# Altium PCB OmniChargePD.PcbDoc (part 1 of 2)
Units mm, origin at the board's own origin, x right, y up, seen from the top; angles counter-clockwise.
Board outline 77.8 x 67.8 mm, 4 copper layers (Top Layer, Signal Layer 1, Signal Layer 2, Bottom Layer), stack 0.778 mm thick; 111 components, 84 nets, 383 pads, 288 vias.
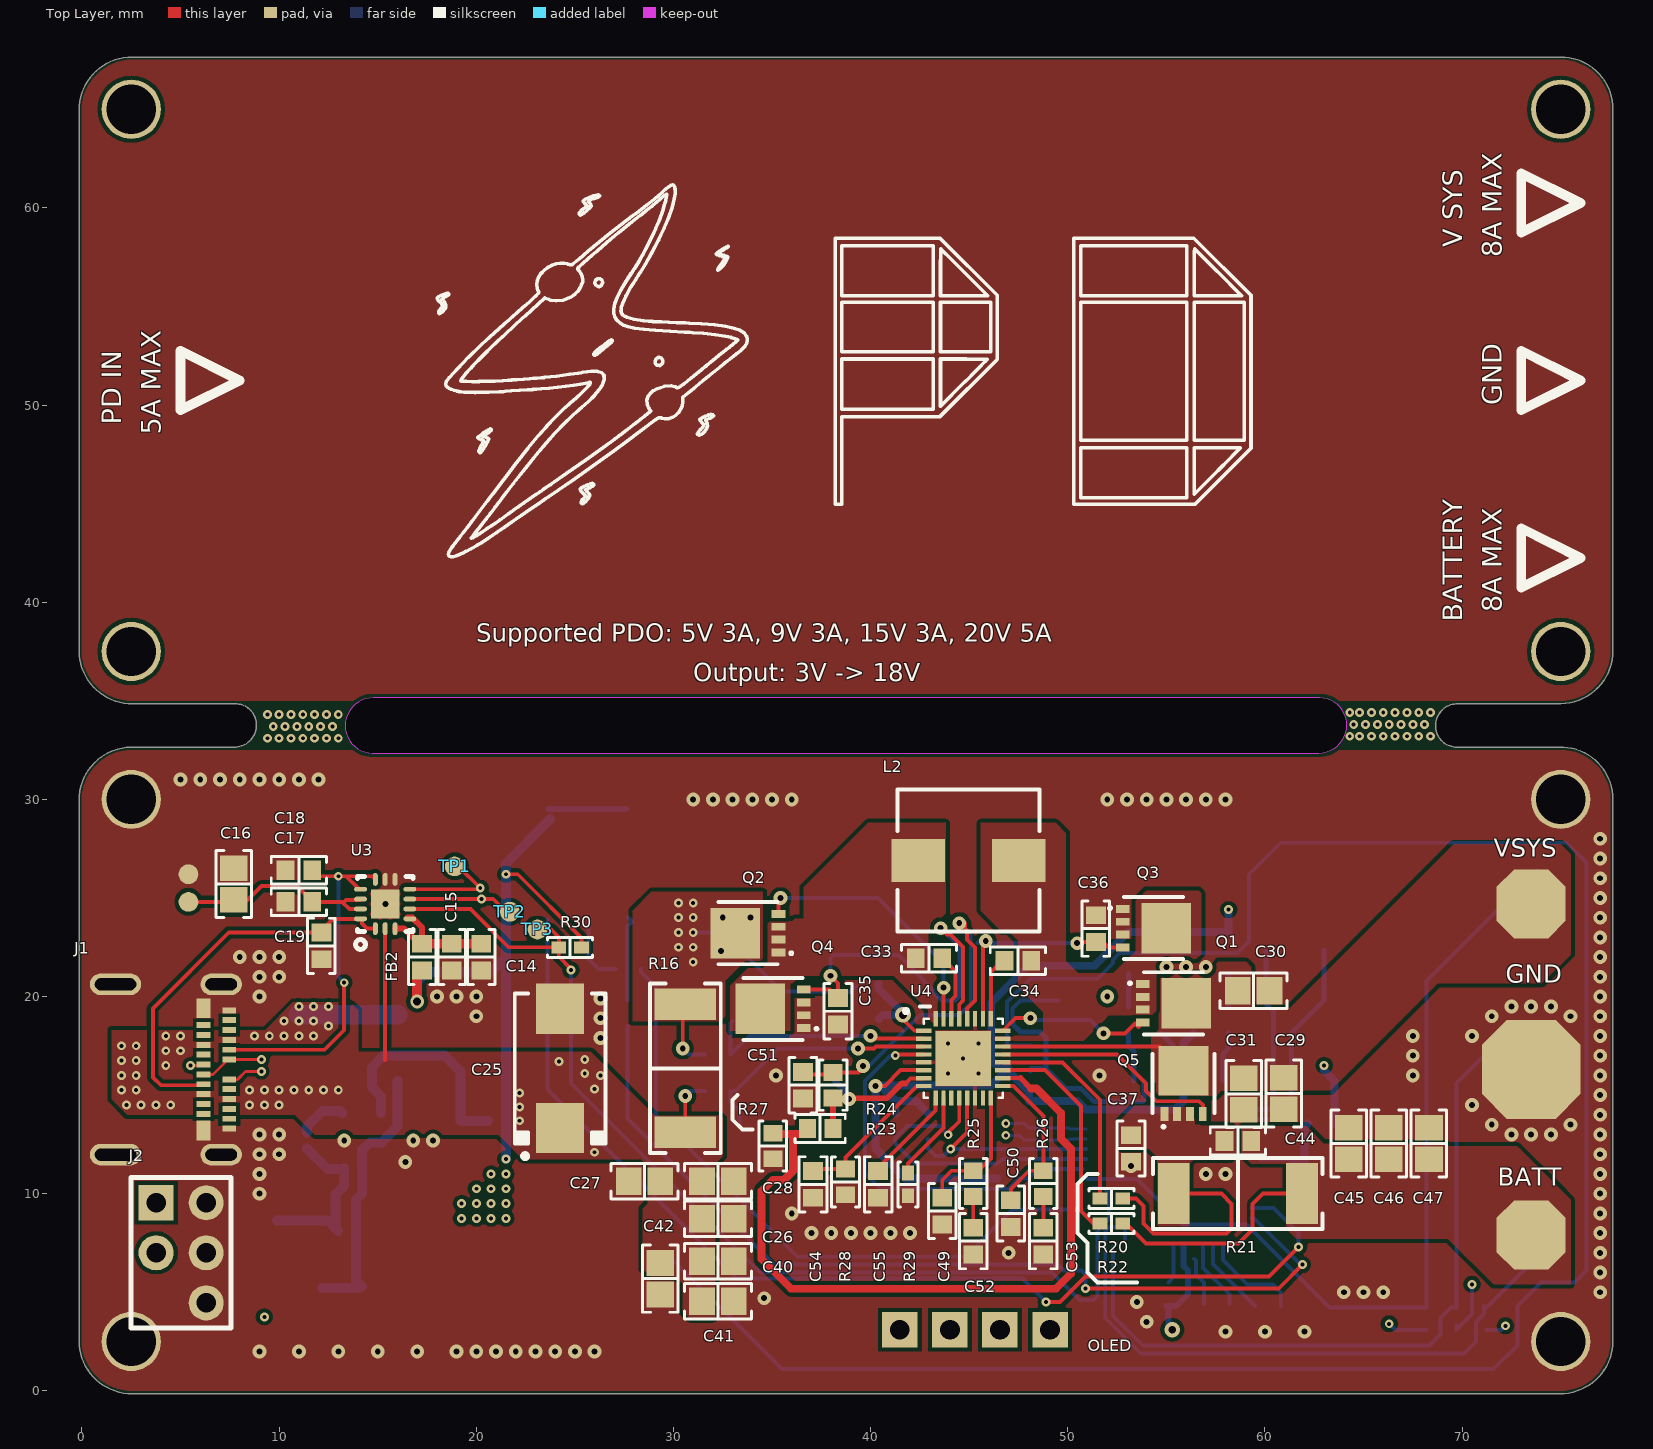
[diagram p0: Top Layer view]
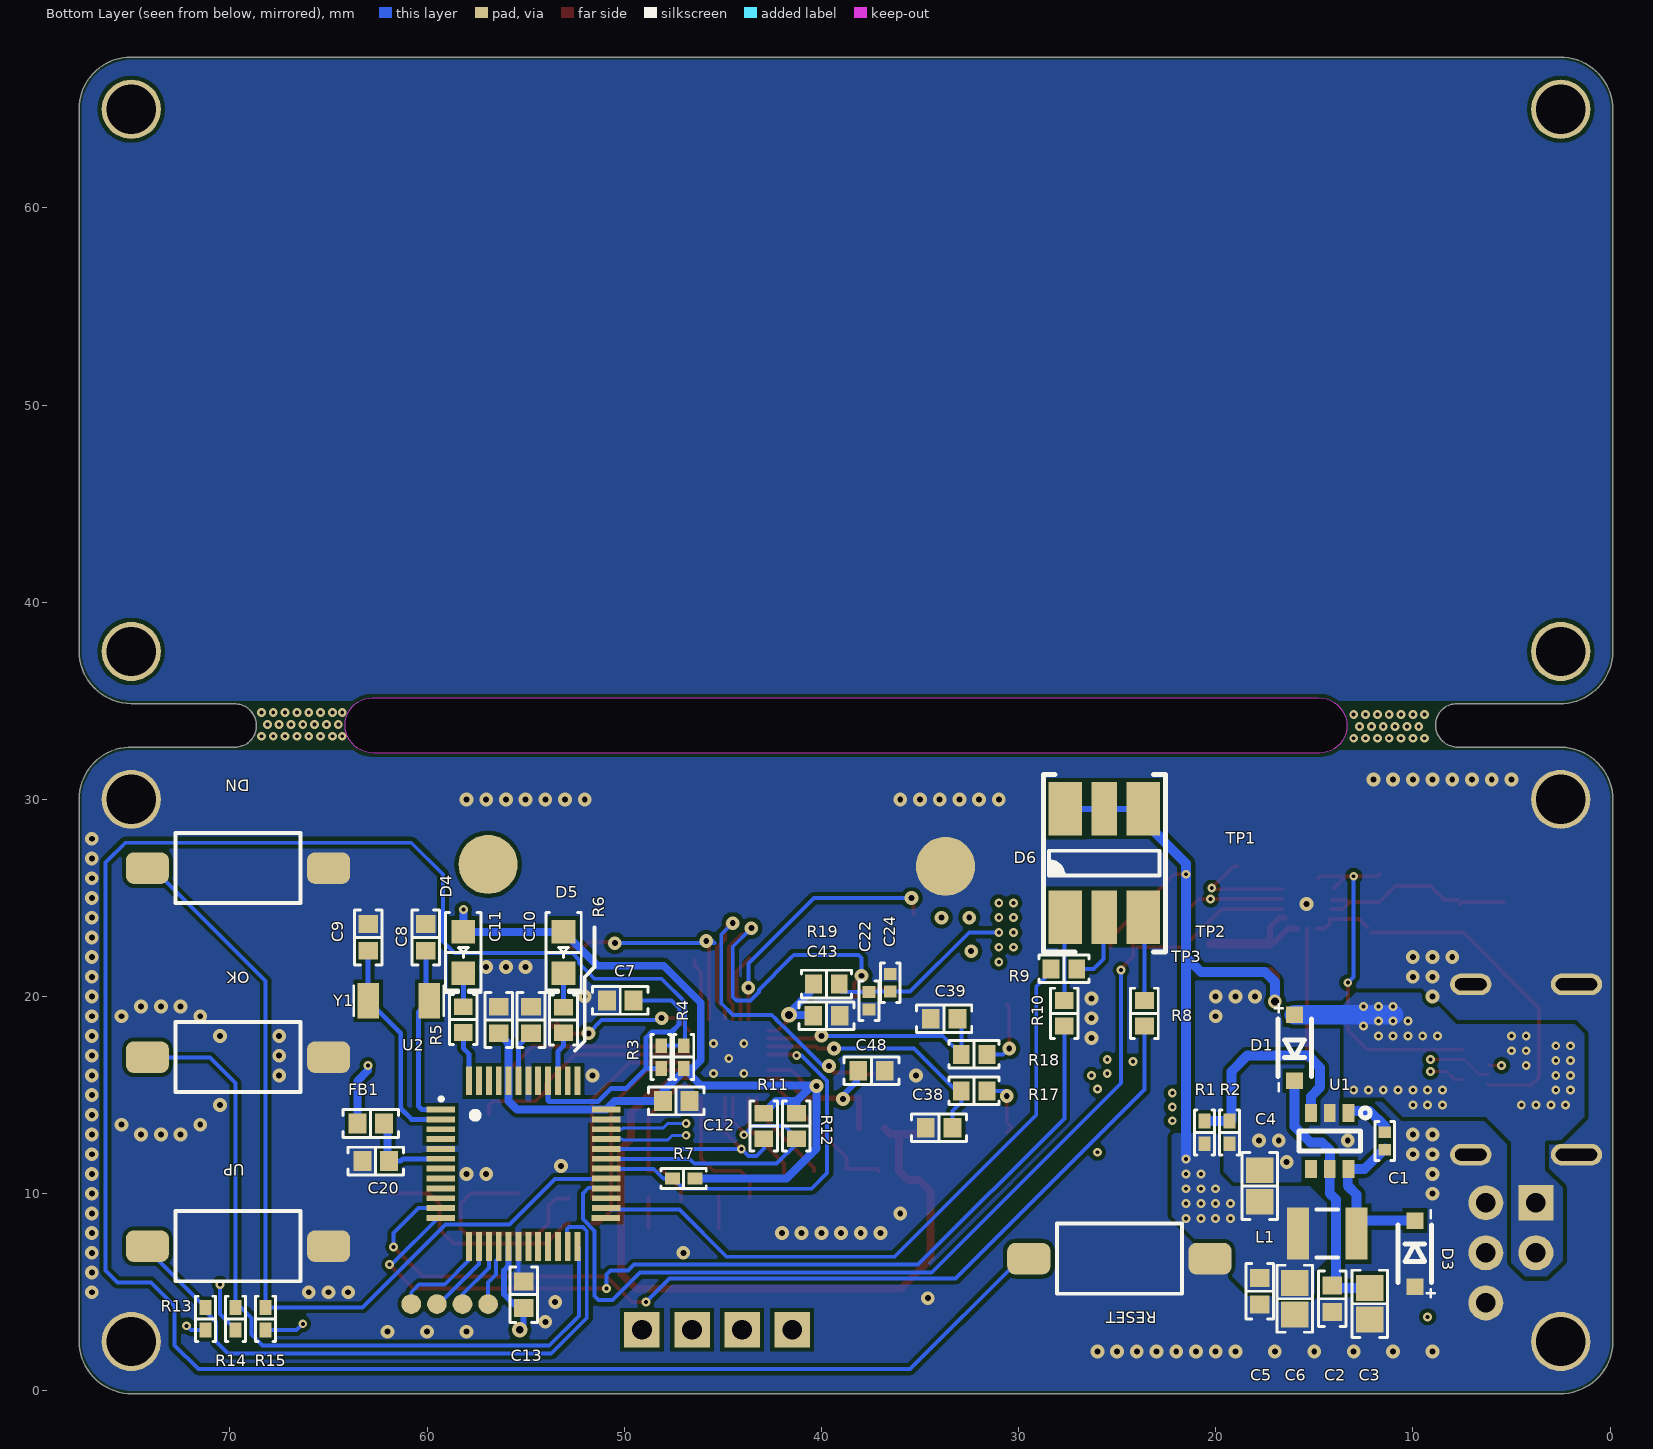
[diagram p1: Bottom Layer view, seen from below]
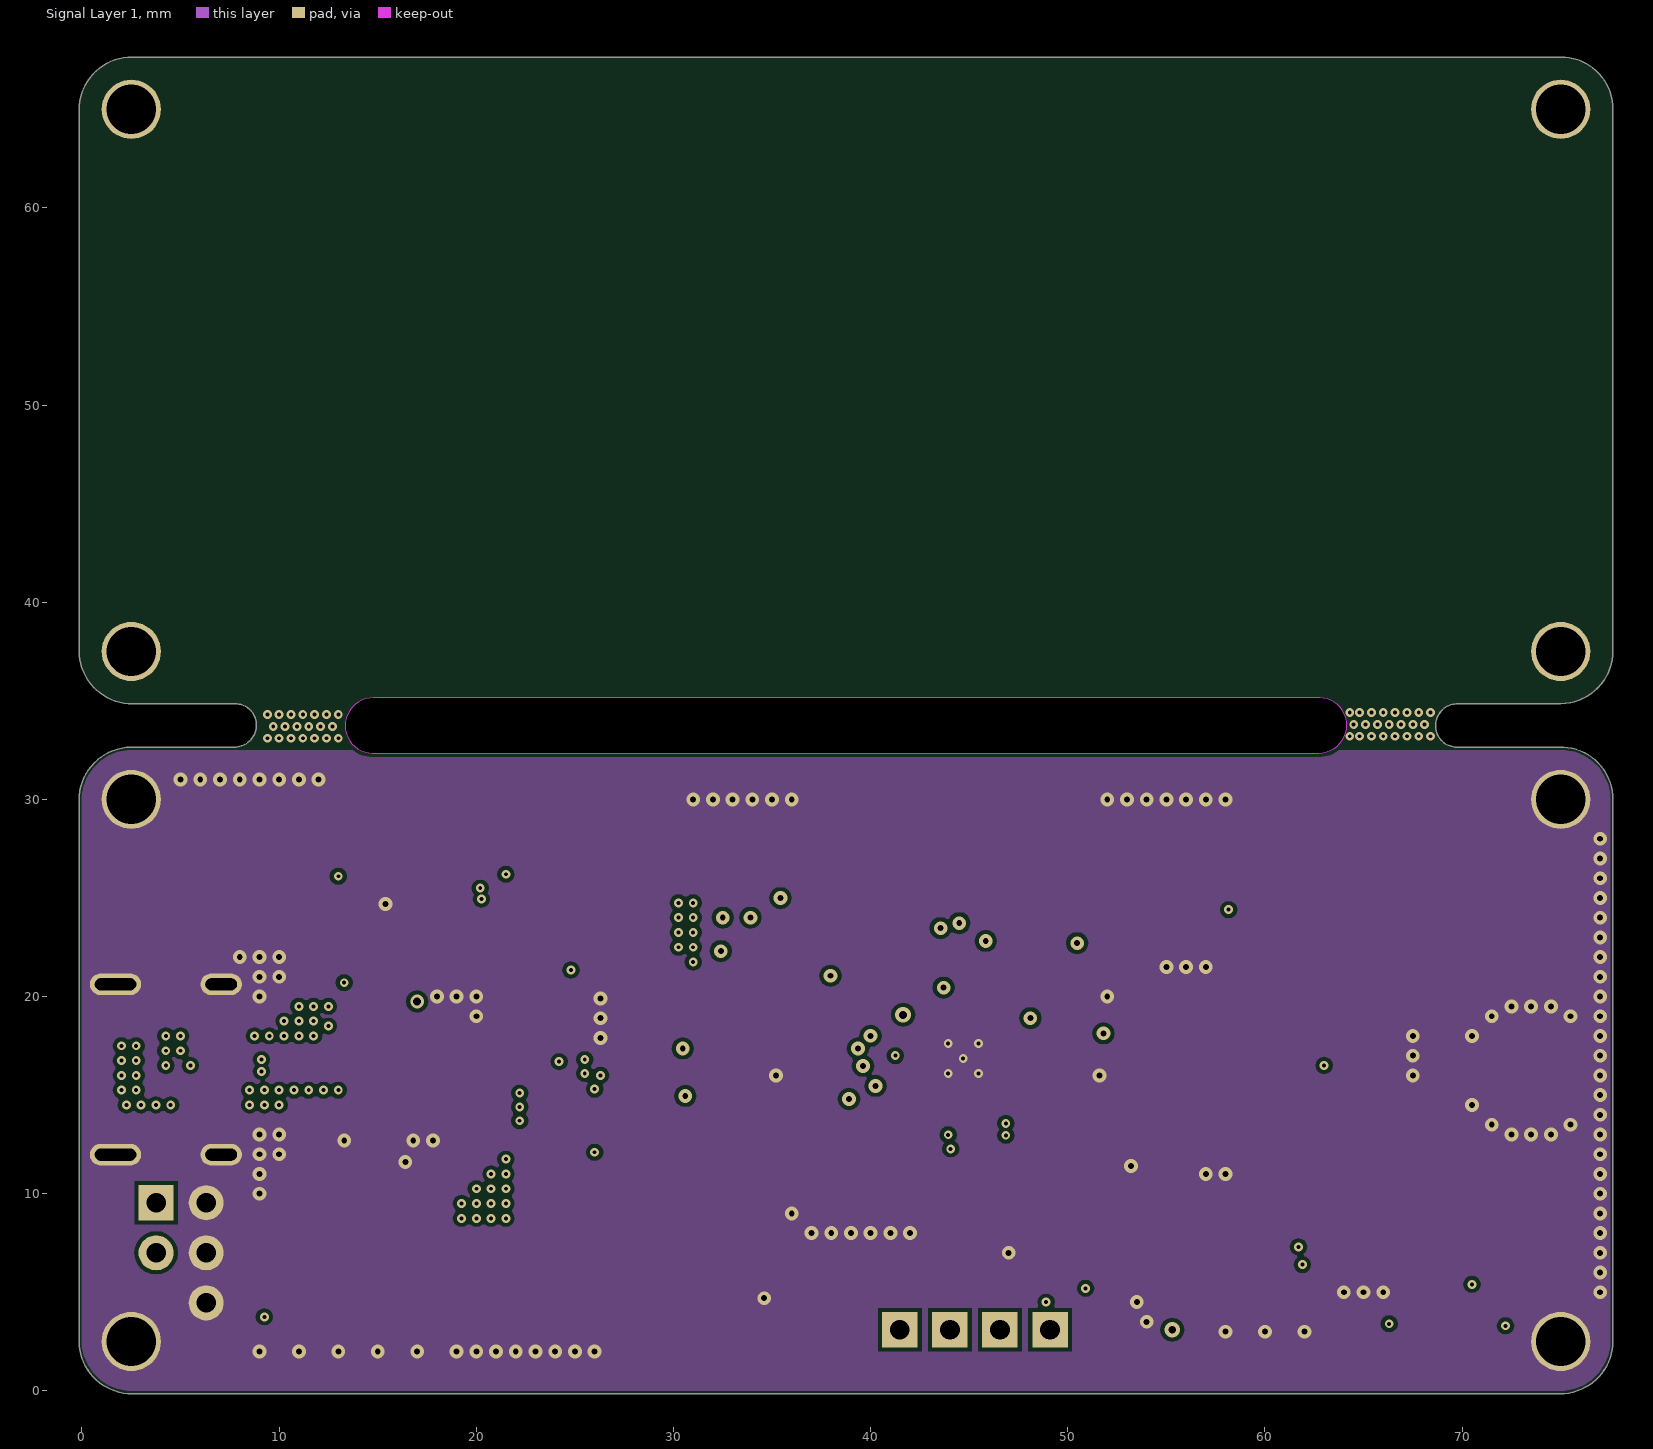
[diagram p2: Signal Layer 1]
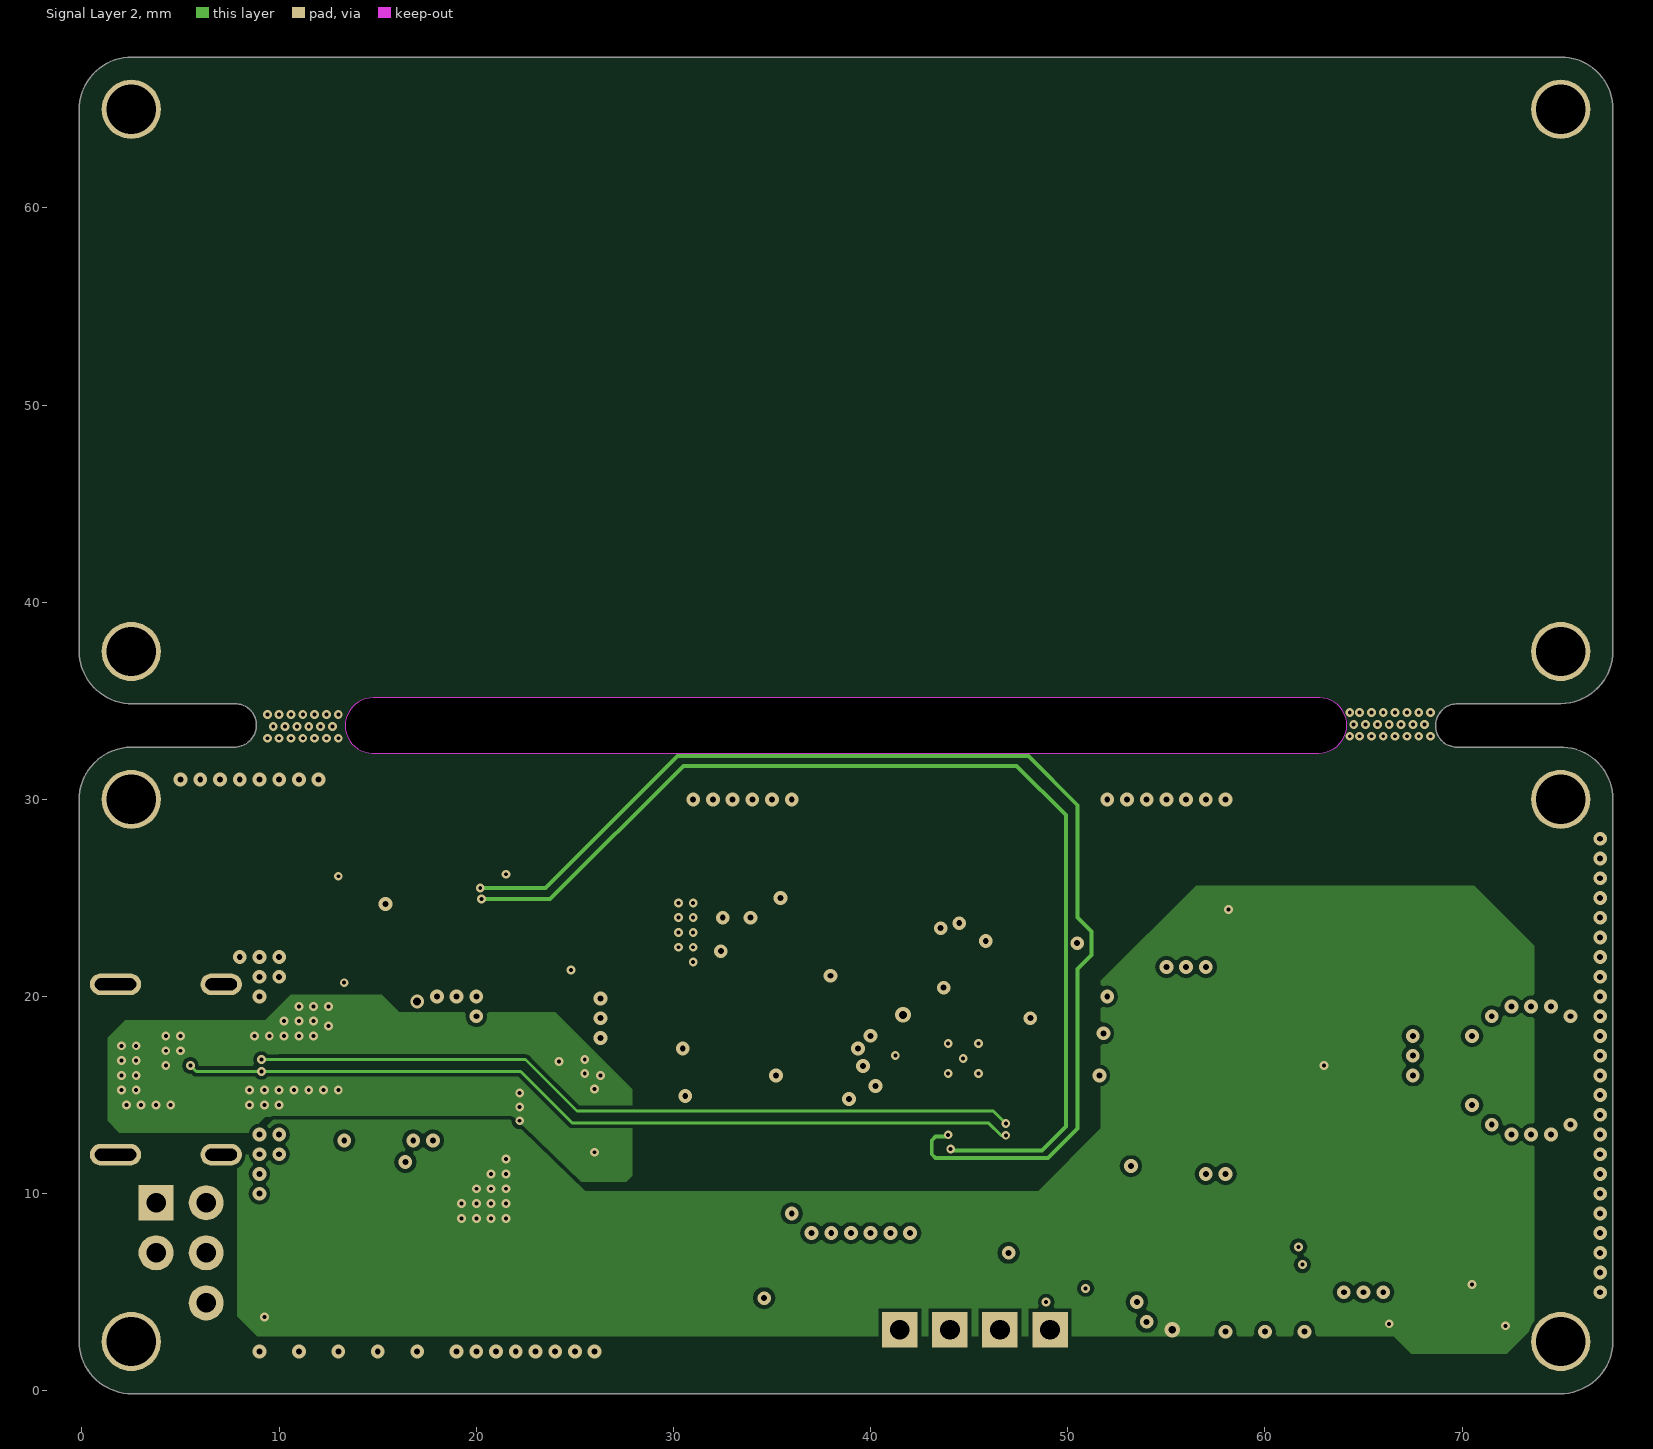
[diagram p3: Signal Layer 2]

## Layer stack, top to bottom
Top Solder: solder mask 0.0102, Solder Resist, Dk 3.5
Top Layer: signal copper 0.0356
Dielectric 1: core 0.254, FR-4, Dk 4.2
Signal Layer 1: signal copper 0.036
Dielectric 3: prepreg 0.127, Dk 4.2
Signal Layer 2: signal copper 0.036
Dielectric 2: core 0.254, Dk 4.2
Bottom Layer: signal copper 0.0356
Bottom Solder: solder mask 0.0102, Solder Resist, Dk 3.5

## Board outline
-0.15,2.54 -0.15,29.96 cw(c2.54,29.96) 2.488,32.65 cw(c2.5,32.5) 2.5,32.65 7.73,32.65 ccw(c7.73,33.77) 8.85,33.77 ccw(c7.77,33.77) 7.77,34.85 2.4,34.85 cw(c2.4,35) 2.357,34.856 cw(c2.54,37.54) -0.15,37.54 -0.15,64.96 cw(c2.54,64.96) 2.54,67.65 75,67.65 cw(c75,65) 77.65,65 77.65,37.54 cw(c74.96,37.54) 75.012,34.85 cw(c75,35) 75,34.85 69.77,34.85 ccw(c69.77,33.73) 68.65,33.73 ccw(c69.73,33.73) 69.73,32.65 75.1,32.65 cw(c75.1,32.5) 75.131,32.647 cw(c75,30) 77.65,30 77.65,2.54 cw(c74.96,2.54) 74.96,-0.15 2.54,-0.15 cw(c2.54,2.54)
cut-out: 14.73,32.35 62.73,32.35 ccw(c62.73,33.77) 64.15,33.77 ccw(c62.77,33.77) 62.77,35.15 14.77,35.15 ccw(c14.77,33.73) 13.35,33.73 ccw(c14.73,33.73)

## Design rules (kind name [scope] priority, off if disabled: settings)
Clearance [All] p1: gap=0.2 ignorepadtopadclearanceinfootprint=FALSE except(0.089: Arc-Arc Arc-Track Arc-SMDPad Arc-THPad Arc-Via Track-Track Track-SMDPad Track-THPad Track-Via SMDPad-SMDPad SMDPad-THPad SMDPad-Via THPad-THPad THPad-Via Via-Via; 0.127: Arc-Text Track-Text SMDPad-Text THPad-Text Via-Text Fill-Text Poly-Text Region-Text Text-Text)
DiffPairsRouting [All] p1: maxlimit=0.45 minlimit=0.45 mostfreqgap=0.45 toplayer_minwidth=0.15 toplayer_maxwidth=0.15 toplayer_prefwidth=0.15 midlayer1_minwidth=0.15 midlayer1_maxwidth=0.15 midlayer1_prefwidth=0.15 midlayer2_minwidth=0.15 midlayer2_maxwidth=0.15 midlayer2_prefwidth=0.15 bottomlayer_minwidth=0.15 bottomlayer_maxwidth=0.15 bottomlayer_prefwidth=0.15 maxuncoupledlength=12.7
HoleSize [All] p1: absolutevalues=TRUE maxlimit=3 minlimit=0.3 maxpercent=80.000 minpercent=20.000
MinimumSolderMaskSliver [All] p1: minsoldermaskwidth=0.1
PlaneClearance [All] p1: clearance=0.2
PlaneConnect PlaneConnect_2 [InNet('5V_2')] p1: planeconnectstyle=Direct reliefexpansion=0.508 reliefentries=4 reliefconductorwidth=0.254 reliefairgap=0.254
PlaneConnect PlaneConnect_1 [InNet('5V_1')] p2: planeconnectstyle=Direct reliefexpansion=0.508 reliefentries=4 reliefconductorwidth=0.254 reliefairgap=0.254
PlaneConnect [All] p3: pad.planeconnectstyle=Relief pad.reliefexpansion=0.508 pad.reliefentries=4 pad.reliefconductorwidth=0.254 pad.reliefairgap=0.254 via.planeconnectstyle=Direct via.reliefexpansion=0.508 via.reliefentries=4 via.reliefconductorwidth=0.254 via.reliefairgap=0.254
PolygonConnect PolygonConnect_11 [All] p1: connectstyle=Direct reliefconductorwidth=0.254 reliefentries=4 polygonreliefangle="90 Angle" airgapwidth=0.254
RoutingVias [All] p1: holewidth=0.3 width=0.7 viastyle="Through Hole" minholewidth=0.2 minwidth=0.45 maxholewidth=2 maxwidth=3
SilkToSilkClearance [All] p1: silktosilkclearance=0
SilkToSolderMaskClearance [IsPad] p1: minsilkscreentomaskgap=0 clearancetoexposedcopper=TRUE
SolderMaskExpansion [All] p1: expansion=0.102
Width [All] p1: maxlimit=3 minlimit=0.15 preferedwidth=0.25
23 further rules are at their usual default settings.

## Classes and differential pairs
component class USB-C: C1 C2 C3 C4 C5 C6 D1 D3 J2 L1 R1 R2 U1 X1 X2 X3 X4
component class MCU: C7 C8 C9 C10 C11 C12 C13 C14 C15 C16 C17 C18 C19 C20 D4 D5 D6 DN FB1 FB2 OK OLED R3 R4 R5 R6 R7 R8 R9 R10 R11 R12 R13 R14 R15 R30 RESET RX TP1 TP2 TP3 TX U2 U3 UP Y1
component class Charger: C22 C24 C25 C26 C27 C28 C29 C30 C31 C33 C34 C35 C36 C37 C38 C39 C40 C41 C42 C43 C44 C45 C46 C47 C48 C49 C50 C51 C52 C53 C54 C55 L2 Q1 Q2 Q3 Q4 Q5 R16 R17 R18 R19 R20 R21 R22 R23 R24 R25 R26 R27 R28 R29 U4
differential pair USB: +USB_P -USB_N

## Components (designator, comment, footprint, x,y, rotation, side; value= is the part's Value field where it differs from the comment)
C1 "10000pF" "CAP 0402/1005" 11.421,12.672 r270 bottom
C2 "1uF" "CAP 0603/1608" 14.088,4.671 r270 bottom
C3 "10uF" "CAP 0805/2012" 12.183,4.417 r90 bottom
C4 "10uF" "CAP 0805/2012" 17.771,10.386 r270 bottom
C5 "1uF" "CAP 0603/1608" 17.771,5.052 r270 bottom
C6 "10uF" "CAP 0805/2012" 15.993,4.671 r90 bottom
C7 "10000pF" "CAP 0603/1608" 50.2,19.8 r180 bottom
C8 "22pF" "CAP 0603/1608" 60.062,22.999 r90 bottom
C9 "22pF" "CAP 0603/1608" 62.983,22.999 r90 bottom
C10 "1uF" "CAP 0603/1608" 54.728,18.808 r270 bottom
C11 "0.1uF" "CAP 0603/1608" 56.363,18.808 r270 bottom
C12 "0.1uF" "CAP 0603/1608" 47.362,14.704 r0 bottom
C13 "0.1uF" "CAP 0603/1608" 55.1,4.875 r270 bottom
C14 "1uF" "CAP 0603/1608" 20.25,22 r90 top
C15 "0.1uF" "CAP 0603/1608" 18.75,22 r90 top
C16 "10uF" "CAP 0805/2012" 7.7,25.7 r270 top
C17 "0.1uF" "CAP 0603/1608" 11,24.8 r0 top
C18 "470pF" "CAP 0603/1608" 11,26.4 r0 top
C19 "470pF" "CAP 0603/1608" 12.143,22.57 r90 top
C20 "0.1uF" "CAP 0603/1608" 62.602,11.656 r180 bottom
C22 "1000pF" "CAP 0402/1005" 37.583,19.784 r270 bottom
C24 "10000pF" "CAP 0402/1005" 36.5,20.7 r90 bottom
C25 "47uF" "CAP POL 2917/7343" 24.248,16.355 r90 top
C26 "10uF" "CAP 0805/2012" 32.249,8.735 r180 top
C27 "10uF" "CAP 0805/2012" 28.528,10.64 r0 top
C28 "10uF" "CAP 0805/2012" 32.249,10.64 r180 top
C29 "10uF" "CAP 0805/2012" 60.951,15.085 r90 top
C30 "10uF" "CAP 0805/2012" 59.427,20.292 r180 top
C31 "10uF" "CAP 0805/2012" 58.919,15.063 r90 top
C33 "0.047uF" "CAP 0603/1608" 42.957,21.943 r180 top
C34 "0.047uF" "CAP 0603/1608" 47.466,21.82 r0 top
C35 "150pF" "CAP 0603/1608" 38.345,19.252 r90 top
C36 "150pF" "CAP 0603/1608" 51.426,23.442 r270 top
C37 "1uF" "CAP 0603/1608" 53.204,12.291 r90 top
C38 "0.033uF" "CAP 0603/1608" 34.027,13.345 r180 bottom
C39 "0.033uF" "CAP 0603/1608" 33.773,18.868 r180 bottom
C40 "10uF" "CAP 0805/2012" 32.249,6.576 r180 top
C41 "10uF" "CAP 0805/2012" 32.249,4.544 r180 top
C42 "10uF" "CAP 0805/2012" 29.328,5.687 r90 top
C43 "0.47uF" "CAP 0603/1608" 39.742,19.022 r180 bottom
C44 "0.1uF" "CAP 0603/1608" 58.625,12.672 r180 top
C45 "10uF" "CAP 0805/2012" 64.253,12.545 r90 top
C46 "10uF" "CAP 0805/2012" 66.285,12.545 r270 top
C47 "10uF" "CAP 0805/2012" 68.317,12.545 r270 top
C48 "1uF" "CAP 0603/1608" 37.456,16.228 r180 bottom
C49 "33pF" "CAP 0603/1608" 43.632,9.116 r90 top
C50 "15pF" "CAP 0603/1608" 47.108,8.989 r90 top
C51 "3.3uF" "CAP 0603/1608" 36.567,15.502 r90 top
C52 "1800pF" "CAP 0603/1608" 45.203,7.592 r90 top
C53 "680pF" "CAP 0603/1608" 48.759,7.592 r90 top
C54 "100pF" "CAP 0603/1608" 37.075,10.473 r90 top
C55 "100pF" "CAP 0603/1608" 40.377,10.473 r90 top
D1 "MF-DIO-SOD123-BAT42" SOD-123 16,17.4 r90 bottom value=BAT42
D3 "MF-DIO-SOD123-BAT42" SOD-123 9.897,6.957 r270 bottom value=BAT42
D4 "Orange" "LED 0805/2012 YELLOW" 58.157,22.231 r270 bottom value=Green
D5 "Orange" "LED 0805/2012 YELLOW" 53.077,22.231 r270 bottom value=Green
D6 "SLV6A-FKB-CK1P1G1BB7R3R3" "LED PLCC6-CREE 5.5x5.3MM" 25.645,26.769 r90 bottom
DN "FSMSMTR" "TE FSMSMTR" 69.587,26.515 r270 bottom locked (schematic designator S4)
FB1 "30 Ohm @ 100MHz" "FER 0603/1608" 62.856,13.561 r180 bottom
FB2 "30 Ohm @ 100MHz" "FER 0603/1608" 17.25,22 r90 top
J1 "1054500101" 1054500101 3.7,16.3 r270 top
J2 "MF-CON-2.54mm-2x3" CONN_HEADER_02x03_2mm54_Straight 5.03,7 r270 top value="HDR 02x03 2mm54 Straight"
L1 "MF-IND-1210-10uH" L1210 14.342,7.973 r0 bottom value=10uH
L2 "2.2uH" "WURTH WE-HCI 7040" 44.959,26.896 r0 top
OK "FSMSMTR" "TE FSMSMTR" 69.587,16.926 r270 bottom locked (schematic designator S3)
OLED "Comment" "Header 1x4 male" 46.56,3.1 r0 top
Q1 "CSD17551Q3A" SON65P300X350X90-9N 55.353,19.657 r0 top
Q2 "CSD17551Q3A" SON65P300X350X90-9N 33.773,23.213 r180 top
Q3 "CSD17551Q3A" SON65P300X350X90-9N 54.337,23.467 r0 top
Q4 "CSD17551Q3A" SON65P300X350X90-9N 35.053,19.375 r180 top
Q5 "CSD25402Q3A" SON65P300X350X90-9N 55.871,15.593 r90 top
R1 "680k" "RES 0402/1005" 20.565,13.112 r270 bottom
R2 "220k" "RES 0402/1005" 19.295,13.112 r90 bottom
R3 "330" "RES 0402/1005" 48.124,16.93 r90 bottom
R4 "10k" "RES 0402/1005" 46.981,16.93 r90 bottom
R5 "470" "RES 0603/1608" 58.157,18.829 r270 bottom
R6 "470" "RES 0603/1608" 53.077,18.81 r270 bottom
R7 "10k" "RES 0402/1005" 46.981,10.77 r0 bottom
R8 "470" "RES 0603/1608" 23.613,19.149 r270 bottom
R9 "470" "RES 0603/1608" 27.7,21.4 r0 bottom
R10 "470" "RES 0603/1608" 27.677,19.149 r270 bottom
R11 "1.5k" "RES 0603/1608" 42.917,13.432 r90 bottom
R12 "1.5k" "RES 0603/1608" 41.266,13.434 r90 bottom
R13 "10k" "RES 0402/1005" 71.238,3.655 r90 bottom
R14 "10k" "RES 0402/1005" 69.714,3.655 r90 bottom
R15 "10k" "RES 0402/1005" 68.19,3.655 r90 bottom
R16 "CSR25120R01F" "STACKPOLE CSR2512" 30.598,16.355 r90 top value=0.01
R17 "4.99" "RES 0603/1608" 32.249,15.212 r180 bottom
R18 "4.99" "RES 0603/1608" 32.249,17.063 r180 bottom
R19 "1" "RES 0603/1608" 39.742,20.632 r0 bottom
R20 "10" "RES 0402/1005" 52.212,9.751 r0 top
R21 "CSR25120R01F" "STACKPOLE CSR2512" 58.627,10.005 r180 top value=0.01
R22 "10" "RES 0402/1005" 52.212,8.481 r0 top
R23 "120k" "RES 0603/1608" 37.441,13.307 r0 top
R24 "10" "RES 0603/1608" 38.091,15.502 r270 top
R25 "40.2k" "RES 0603/1608" 45.203,10.513 r90 top
R26 "10k" "RES 0603/1608" 48.759,10.513 r90 top
R27 "100k" "RES 0603/1608" 35.043,12.418 r90 top
R28 "137k" "RES 0603/1608" 38.726,10.6 r90 top
R29 "30.1k" "RES 0402/1005" 41.901,10.473 r90 top
R30 "10k" "RES 0402/1005" 24.756,22.492 r0 top
RESET "FSMSMTR" "TE FSMSMTR" 24.883,6.703 r270 bottom (schematic designator S1)
TP1 "TESTPOINT" TP_1mm 18.9,26.6 r90 top
TP2 "TESTPOINT" TP_1mm 21.7,24.3 r90 top
TP3 "TESTPOINT" TP_1mm 23.1,23.4 r90 top
U1 "RT8258GJ6" SOT23-6 14.215,12.672 r270 bottom
U2 "ATSAMD21G18A-AUT" QFP50P900X900X120-48N 55.113,11.52 r180 bottom
U3 "FUSB302BMPX" MLP14 15.378,24.692 r90 top
U4 "BQ25703ARSNT" QFN40P400X400X80-33N 44.695,16.863 r0 top
UP "FSMSMTR" "TE FSMSMTR" 69.587,7.338 r270 bottom locked (schematic designator S2)
Y1 "32.768Khz" RESONATOR_EPSON_FC_145 61.433,19.784 r0 bottom

## Footprints (in the part's own frame and the unit in brackets; to place one, negate y for a bottom-side part, rotate by r counter-clockwise, add the part's x,y. Pads: shape width x height; smd on the part's side, far side on the other; paste and mask are expansions set on the pad)
1054500101 [mm]
  rect 0.3x0.7 smd: A1(-3,3.77) A2(-2.5,3.77) A3(-2,3.77) A4(-1.5,3.77) A5(-1,3.77) A6(-0.5,3.77) A7(0.5,3.77) A8(1,3.77) A9(1.5,3.77) A10(2,3.77) A11(2.5,3.77) A12(3,3.77) B2(2.25,2.47) B3(1.75,2.47) B4(1.25,2.47) B5(0.75,2.47) B6(0.25,2.47) B7(-0.25,2.47) B8(-0.75,2.47) B9(-1.25,2.47) B10(-1.75,2.47) B11(-2.25,2.47)
  rect 1x0.7 smd: B1(3.1,2.47) B12(-3.1,2.47)
  oval 1.1x2.1 hole 0.6 slot 1.6 at 90 deg: S1(-4.32,3.36) S2(4.32,3.36)
  oval 1.1x2.6 hole 0.6 slot 2.1 at 90 deg: S3(-4.32,-2) S4(4.32,-2)
  body extent -4.47,-3.94 4.47,3.96, height 3.16
"CAP 0402/1005" [mm] "Chip Capacitor, 2-Leads, Body 1.02x0.51mm, IPC Medium Density"
  rect 0.6x0.64 smd: 1(-0.44,0) 2(0.44,0)
  silkscreen extent -1,-0.5 1,0.5, body extent -0.5,-0.26 0.5,0.26, height 0.52
"CAP 0603/1608" [mm] "Chip Capacitor, 2-Leads, Body 1.60x0.80mm, IPC Medium Density"
  rect 0.9x1 smd: 1(-0.675,0) 2(0.675,0)
  silkscreen extent -1.4,-0.7 1.4,0.7, body extent -0.8,-0.41 0.8,0.41, height 0.82
"CAP 0805/2012" [mm] "Chip Capacitor, 2-Leads, Body 2.00x1.20mm, IPC Medium Density"
  rect 1.3x1.4 smd: 1(-0.8,0) 2(0.8,0)
  silkscreen extent -1.7,-0.9 1.7,0.9, body extent -1,-0.64 1,0.64, height 1.26
"CAP POL 2917/7343" [mm] "Molded Capacitor, 2-Leads, Body 7.30x4.30mm, IPC Medium Density"
  rect 2.55x2.45 smd: 1(-3.025,0) 2(3.025,0)
  silkscreen extent -4.57,-2.3 3.8,2.3, body extent -3.65,-2.15 3.65,2.15, height 4.1
CONN_HEADER_02x03_2mm54_Straight [mil]
  rect 70x70 hole 39: 1(-100,-50)
  round 70 hole 39: 2(-100,50) 3(0,-50) 4(0,50) 6(100,50)
  round 0 smd: 5(100,-50)
  silkscreen extent -150,-100 150,100, body extent -150,-100 150,100, height 364
"FER 0603/1608" [mm] "Chip Ferrite, 2-Leads, Body 1.60x0.80mm, IPC Medium Density"
  rect 0.9x1 smd: 1(-0.675,0) 2(0.675,0)
  silkscreen extent -1.4,-0.7 1.4,0.7, body extent -0.8,-0.41 0.8,0.41, height 0.82
"Header 1x4 male" [mm] "2.54mm"
  rect 1.8x1.8 hole 1: 1(-5.08,0) 2(-2.54,0) 3(0,0) 4(2.54,0)
  body extent -6.35,-1.27 3.81,1.27, height 8.6
L1210 [mm]
  rect 1.1x2.64 smd: 1(-1.48,0) 2(1.48,0)
  silkscreen extent -0.55,-1.22 0.55,1.22, body extent -1.6,-1.25 1.6,1.25, height 2.5
"LED 0805/2012 YELLOW" [mm] "Chip Diode, 2-Leads, Body 2.00x1.25mm, IPC Medium Density"
  rect 1.2x1.2 smd: 1(-1.05,0) 2(1.05,0)
  silkscreen extent -2.03,-0.9 2.03,0.9, body extent -1,-0.63 1,0.63, height 0.9
"LED PLCC6-CREE 5.5x5.3MM" [mm] "SOJ, 6-Leads, Body 5.60x5.50mm, Pitch 1.80mm, IPC Medium Density"
  rect 2.7x1.7 smd: 1(-2.75,1.975) 3(-2.75,-1.975) 4(2.75,-1.975) 6(2.75,1.975)
  rect 2.7x1.3 smd: 2(-2.75,0) 5(2.75,0)
  silkscreen extent -4.5,-3.1 4.5,3.1, body extent -2.75,-2.75 2.75,2.75, height 2.6
MLP14 [mm]
  oval 0.65x0.25 smd: 1(-1.25,0.5) 2(-1.25,0) 3(-1.25,-0.5) 8(1.25,-0.5) 9(1.25,0) 10(1.25,0.5)
  oval 0.25x0.65 smd: 4(-0.75,-1.25) 5(-0.25,-1.25) 6(0.25,-1.25) 7(0.75,-1.25) 11(0.75,1.25) 12(0.25,1.25) 13(-0.25,1.25) 14(-0.75,1.25)
  rect 1.45x1.45 smd: 15(0,0)
  silkscreen extent -2.3,-1.4 1.4,1.5, body extent -1.25,-1.25 1.25,1.25, height 0.8
QFN40P400X400X80-33N [mm]
  rect 0.77x0.22 smd: 1(-2.005,1.4) 2(-2.005,1) 3(-2.005,0.6) 4(-2.005,0.2) 5(-2.005,-0.2) 6(-2.005,-0.6) 7(-2.005,-1) 8(-2.005,-1.4) 17(2.005,-1.4) 18(2.005,-1) 19(2.005,-0.6) 20(2.005,-0.2) 21(2.005,0.2) 22(2.005,0.6) 23(2.005,1) 24(2.005,1.4)
  rect 0.22x0.77 smd: 9(-1.4,-2.005) 10(-1,-2.005) 11(-0.6,-2.005) 12(-0.2,-2.005) 13(0.2,-2.005) 14(0.6,-2.005) 15(1,-2.005) 16(1.4,-2.005) 25(1.4,2.005) 26(1,2.005) 27(0.6,2.005) 28(0.2,2.005) 29(-0.2,2.005) 30(-0.6,2.005) 31(-1,2.005) 32(-1.4,2.005)
  rect 2.8x2.8 smd: 33(0,0)
  silkscreen extent -3,-2 2,2.5, body extent -2,-2 2,2, height 1.1
QFP50P900X900X120-48N [mm]
  rect 1.45x0.3 smd: 1(-4.2,2.75) 2(-4.2,2.25) 3(-4.2,1.75) 4(-4.2,1.25) 5(-4.2,0.75) 6(-4.2,0.25) 7(-4.2,-0.25) 8(-4.2,-0.75) 9(-4.2,-1.25) 10(-4.2,-1.75) 11(-4.2,-2.25) 12(-4.2,-2.75) 25(4.17,-2.75) 26(4.2,-2.25) 27(4.2,-1.75) 28(4.2,-1.25) 29(4.2,-0.75) 30(4.2,-0.25) 31(4.2,0.25) 32(4.2,0.75) 33(4.2,1.25) 34(4.2,1.75) 35(4.2,2.25) 36(4.2,2.75)
  rect 0.3x1.45 smd: 13(-2.75,-4.2) 14(-2.25,-4.2) 15(-1.75,-4.2) 16(-1.25,-4.2) 17(-0.75,-4.2) 18(-0.25,-4.2) 19(0.25,-4.2) 20(0.75,-4.2) 21(1.25,-4.2) 22(1.75,-4.2) 23(2.25,-4.2) 24(2.75,-4.2) 37(2.75,4.2) 38(2.25,4.2) 39(1.75,4.2) 40(1.25,4.2) 41(0.75,4.2) 42(0.25,4.2) 43(-0.25,4.2) 44(-0.75,4.2) 45(-1.25,4.2) 46(-1.75,4.2) 47(-2.25,4.2) 48(-2.75,4.2)
  silkscreen extent -4.27,2.33 -2.32,3.38
"RES 0402/1005" [mm] "Chip Resistor, 2-Leads, Body 1.0x0.5mm, IPC Medium Density"
  rect 0.75x0.6 smd: 1(-0.575,0) 2(0.575,0)
  silkscreen extent -1.14,-0.51 1.14,0.51, body extent -0.5,-0.25 0.5,0.25, height 0.35
"RES 0603/1608" [mm] "Chip Resistor, 2-Leads, Body 1.60x0.80mm, IPC Medium Density"
  rect 0.85x0.95 smd: 1(-0.65,0) 2(0.65,0)
  silkscreen extent -1.27,-0.7 1.27,0.7, body extent -0.8,-0.4 0.8,0.4, height 0.45
RESONATOR_EPSON_FC_145 [mm]
  rect 1.1x1.8 smd: P$1(-1.55,0) P$2(1.55,0)
  silkscreen extent -2.29,-0.76 2.29,0.76
SOD-123 [mm]
  rect 0.85x0.85 smd: 1(-1.675,0) 2(1.675,0)
  silkscreen extent -2.2,-0.85 2.2,1, body extent -1.43,-0.85 1.42,0.85, height 1.35
SON65P300X350X90-9N [mm]
  rect 0.7x0.4 smd: 1(-1.55,0.975) 2(-1.55,0.325) 3(-1.55,-0.325) 4(-1.55,-0.975)
  rect 2.51x2.55 smd: 5(0.645,0)
  silkscreen extent -2.28,-1.58 1.5,1.58, body extent -1.55,-1.68 1.81,1.68, height 1
SOT23-6 [mm]
  rect 0.9x0.6 smd: 1(-1.425,0.95) 2(-1.425,0) 3(-1.425,-0.95) 4(1.425,-0.95) 5(1.425,0) 6(1.425,0.95)
  silkscreen extent -1.67,-1.55 0.5,2.05, body extent -1.5,-1.55 1.5,1.55, height 1.3
"STACKPOLE CSR2512" [mm] "Chip Resistor, 2-Leads, Body 6.40x3.20mm, IPC Medium Density"
  rect 1.6x3.1 smd: 1(-3.25,0) 2(3.25,0)
  silkscreen extent -4.3,-1.8 4.3,1.8, body extent -3.27,-1.6 3.28,1.6, height 0.5
"TE FSMSMTR" [mm]
  rrect50% 1.6x2.19 smd: 1(0,4.595) 2(0,-4.595)
  silkscreen extent -1.78,-3.18 1.78,3.18, body extent -1.75,-4.98 1.75,4.98, height 4.42
TP_1mm [mm]
  round 1 smd paste-100: 1(0,0)
"WURTH WE-HCI 7040" [mm]
  rect 2.7x2.2 smd: 1(-2.55,0) 2(2.55,0)
  silkscreen extent -3.6,-3.6 3.6,3.6, body extent -3.49,-3.45 3.49,3.45, height 4

## Part data
C1 C24: library part GCM155R71H103KA55D, "CAP CER 10000PF 50V X7R 0402", Device Package="0402 (1005 Metric)", Manufacturer="Murata Electronics North America", Supplier Part Number 1=490-4762-2-ND, TemperatureCoefficient=X7R, TemperatureRange="-55C ~ 125C", Tolerance=10%, Voltage=50V, ComponentLink1Description=Datasheet, ComponentLink1URL=http://www.murata.com/~/media/webrenewal/support/library/catalog/products/capacitor/mlcc/c03e.ashx, ComponentLink2Description="Digi-Key Listing", ComponentLink2URL=https://www.digikey.com/product-detail/en/murata-electronics-north-america/GCM155R71H103KA55D/490-4762-2-ND/1641636, PartId=12381, Part Number=GCM155R71H103KA55D, Price=0,0067, Supplier 1=Digi-Key
C2 C5 C37 C48: library part GRM188R7YA105KA12D, "CAP CER 1UF 35V X7R 0603", Device Package="0603 (1608 Metric)", Manufacturer="Murata Electronics North America", Supplier Part Number 1=490-10487-2-ND, TemperatureCoefficient=X7R, TemperatureRange="-55C ~ 125C", Tolerance=10%, Voltage=35V, ComponentLink1Description=Datasheet, ComponentLink1URL=http://www.murata.com/~/media/webrenewal/support/library/catalog/products/capacitor/mlcc/c02e.ashx, ComponentLink2Description="Digi-Key listing", ComponentLink2URL=http://digikey.com/product-detail/en/GRM188R7YA105KA12D/490-10487-2-ND/5027572, PartId=5658, Part Number=GRM188R7YA105KA12D, Price=0,0735, Supplier 1=Digi-Key, Type="Derating Recommended"
C3 C4 C6 C16 C26 C27 C28 C29 C30 C31 C40 C41 C42 C45 C46 C47: library part C2012X5R1V106M085AC, "CAP CER 10UF 35V X5R 0805", Device Package="0805 (2012 Metric)", Manufacturer="TDK Corporation", Supplier Part Number 1=445-14419-2-ND, TemperatureCoefficient=X5R, TemperatureRange="-55C ~ 85C", Tolerance=20%, Voltage=35V, ComponentLink1Description=Datasheet, ComponentLink1URL=https://product.tdk.com/info/en/catalog/datasheets/mlcc_commercial_general_en.pdf, ComponentLink2Description="Digi-Key listing", ComponentLink2URL=http://digikey.com/product-detail/en/C2012X5R1V106M085AC/445-14419-2-ND/3951655, PartId=4768, Part Number=C2012X5R1V106M085AC, Price=0,2152, Supplier 1=Digi-Key, Type=-
C7: library part C0603C103M5RACTU, "CAP CER 10000PF 50V X7R 0603", Device Package="0603 (1608 Metric)", Manufacturer=Kemet, Supplier Part Number 1=399-7842-2-ND, TemperatureCoefficient=X7R, TemperatureRange="-55C ~ 125C", Tolerance=20%, Voltage=50V, ComponentLink1Description=Datasheet, ComponentLink1URL=http://www.kemet.com/docfinder?Partnumber=C0603C103M5RACTU, ComponentLink2Description="Digi-Key Listing", ComponentLink2URL=https://www.digikey.com/product-detail/en/kemet/C0603C103M5RACTU/399-7842-2-ND/2199766, PartId=13383, Part Number=C0603C103M5RACTU, Price=0,0046, Supplier 1=Digi-Key
C8 C9: library part C1608C0G1H220J080AA, "CAP CER 22PF 50V C0G 0603", Device Package="0603 (1608 Metric)", Manufacturer="TDK Corporation", Supplier Part Number 1=445-1273-1-ND, TemperatureCoefficient="C0G, NP0", TemperatureRange="-55C ~ 125C", Tolerance=5%, Voltage=50V, ComponentLink1Description=Datasheet, ComponentLink1URL=https://product.tdk.com/info/en/catalog/datasheets/mlcc_commercial_general_en.pdf, ComponentLink2Description="Digi-Key listing", ComponentLink2URL=http://digikey.com/product-detail/en/C1608C0G1H220J080AA/445-1273-1-ND/567670, PartId=4031, Part Number=C1608C0G1H220J080AA, Price=0,14, Supplier 1=Digi-Key, Type=-
C10 C14: library part C1608X7R1A105K080AC, "CAP CER 1UF 10V X7R 0603", Device Package="0603 (1608 Metric)", Manufacturer="TDK Corporation", Supplier Part Number 1=445-5138-1-ND, TemperatureCoefficient=X7R, TemperatureRange="-55C ~ 125C", Tolerance=10%, Voltage=10V, ComponentLink1Description=Datasheet, ComponentLink1URL=https://product.tdk.com/info/en/catalog/datasheets/mlcc_commercial_general_en.pdf, ComponentLink2Description="Digi-Key listing", ComponentLink2URL=http://digikey.com/product-detail/en/C1608X7R1A105K080AC/445-5138-1-ND/2093753, PartId=4035, Part Number=C1608X7R1A105K080AC, Price=0,14, Supplier 1=Digi-Key, Type=-
C11 C12 C13 C15 C17 C20 C44: library part C1608X7R1E104K080AA, "CAP CER 0.1UF 25V X7R 0603", Device Package="0603 (1608 Metric)", Manufacturer="TDK Corporation", Supplier Part Number 1=445-1316-1-ND, TemperatureCoefficient=X7R, TemperatureRange="-55C ~ 125C", Tolerance=10%, Voltage=25V, ComponentLink1Description=Datasheet, ComponentLink1URL=https://product.tdk.com/info/en/catalog/datasheets/mlcc_commercial_general_en.pdf, ComponentLink2Description="Digi-Key listing", ComponentLink2URL=http://digikey.com/product-detail/en/C1608X7R1E104K080AA/445-1316-1-ND/567697, PartId=4029, Part Number=C1608X7R1E104K080AA, Price=0,14, Supplier 1=Digi-Key, Type=-
C18 C19: library part C0603C471J5GACTU, "CAP CER 470PF 50V NP0 0603", Device Package="0603 (1608 Metric)", Manufacturer=Kemet, Supplier Part Number 1=399-7922-2-ND, TemperatureCoefficient="C0G, NP0", TemperatureRange="-55C ~ 125C", Tolerance=5%, Voltage=50V, ComponentLink1Description=Datasheet, ComponentLink1URL=http://www.kemet.com/docfinder?Partnumber=C0603C471J5GACTU, ComponentLink2Description="Digi-Key Listing", ComponentLink2URL=https://www.digikey.com/product-detail/en/kemet/C0603C471J5GACTU/399-7922-2-ND/2200803, PartId=13172, Part Number=C0603C471J5GACTU, Price=0,0087, Supplier 1=Digi-Key
C22: library part GRM155R61H102KA01D, "CAP CER 1000PF 50V X5R 0402", Device Package="0402 (1005 Metric)", Manufacturer="Murata Electronics North America", Supplier Part Number 1=490-6316-2-ND, TemperatureCoefficient=X5R, TemperatureRange="-55C ~ 85C", Tolerance=10%, Voltage=50V, ComponentLink1Description=Datasheet, ComponentLink1URL=http://www.murata.com/~/media/webrenewal/support/library/catalog/products/capacitor/mlcc/c02e.pdf, ComponentLink2Description="Digi-Key Listing", ComponentLink2URL=https://www.digikey.com/product-detail/en/murata-electronics-north-america/GRM155R61H102KA01D/490-6316-2-ND/2610872, PartId=12849, Part Number=GRM155R61H102KA01D, Price=0,0039, Supplier 1=Digi-Key
C25: library part T491X476M035AT, "CAP TANT 47UF 35V 20% 2917", Device Package="2917 (7343 Metric)", Manufacturer=Kemet, Supplier Part Number 1=399-8421-2-ND, TemperatureRange="-55C ~ 125C", Tolerance=20%, Voltage=35V, ComponentLink1Description=Datasheet, ComponentLink1URL=http://www.kemet.com/Lists/ProductCatalog/Attachments/254/KEM_T2005_T491.pdf, ComponentLink2Description="Digi-Key listing", ComponentLink2URL=http://digikey.com/product-detail/en/T491X476M035AT/399-8421-2-ND/2336393, PartId=6949, Part Number=T491X476M035AT, Price=1,3769, Supplier 1=Digi-Key, Type="General Purpose"
C33 C34: library part 500R14W473KV4T, "CAP CER 0.047UF 50V X7R 0603", Device Package="0603 (1608 Metric)", Manufacturer="Johanson Dielectrics Inc.", Supplier Part Number 1=709-1165-2-ND, TemperatureCoefficient=X7R, TemperatureRange="-55C ~ 125C", Tolerance=10%, Voltage=50V, ComponentLink1Description=Datasheet, ComponentLink1URL=https://www.johansondielectrics.com/downloads/jdi-product-catalog.pdf, ComponentLink2Description="Digi-Key Listing", ComponentLink2URL=https://www.digikey.com/product-detail/en/johanson-dielectrics-inc/500R14W473KV4T/709-1165-2-ND/1859410, PartId=30591, Part Number=500R14W473KV4T, Price=0, Supplier 1=Digi-Key
C35 C36: library part C1608C0G1H151K080AA, "CAP CER 150PF 50V C0G 0603", Device Package="0603 (1608 Metric)", Manufacturer="TDK Corporation", Supplier Part Number 1=445-13973-1-ND, TemperatureCoefficient="C0G, NP0", TemperatureRange="-55C ~ 125C", Tolerance=10%, Voltage=50V, ComponentLink1Description=Datasheet, ComponentLink1URL=https://product.tdk.com/info/en/catalog/datasheets/mlcc_commercial_general_en.pdf, ComponentLink2Description="Digi-Key listing", ComponentLink2URL=http://digikey.com/product-detail/en/C1608C0G1H151K080AA/445-13973-1-ND/3955639, PartId=4298, Part Number=C1608C0G1H151K080AA, Price=0,14, Supplier 1=Digi-Key, Type=-
C38 C39: library part C1608X7R1H333K080AA, "CAP CER 0.033UF 50V X7R 0603", Device Package="0603 (1608 Metric)", Manufacturer="TDK Corporation", Supplier Part Number 1=445-5093-1-ND, TemperatureCoefficient=X7R, TemperatureRange="-55C ~ 125C", Tolerance=10%, Voltage=50V, ComponentLink1Description=Datasheet, ComponentLink1URL=https://product.tdk.com/info/en/catalog/datasheets/mlcc_commercial_general_en.pdf, ComponentLink2Description="Digi-Key listing", ComponentLink2URL=http://digikey.com/product-detail/en/C1608X7R1H333K080AA/445-5093-1-ND/2093708, PartId=4079, Part Number=C1608X7R1H333K080AA, Price=0,14, Supplier 1=Digi-Key, Type=-
C43: library part UMK107ABJ474KA-T, "CAP CER 0.47UF 50V X5R 0603", Device Package="0603 (1608 Metric)", Manufacturer="Taiyo Yuden", Supplier Part Number 1=587-3171-2-ND, TemperatureCoefficient=X5R, TemperatureRange="-55C ~ 85C", Tolerance=10%, Voltage=50V, ComponentLink1Description=Datasheet, ComponentLink1URL=//media.digikey.com/pdf/Data%20Sheets/Taiyo%20Yuden%20PDFs%20URL%20links/UMK107ABJ474KA-T.pdf, ComponentLink2Description="Digi-Key Listing", ComponentLink2URL=https://www.digikey.com/product-detail/en/taiyo-yuden/UMK107ABJ474KA-T/587-3171-2-ND/3194980, PartId=13181, Part Number=UMK107ABJ474KA-T, Price=0,0156, Supplier 1=Digi-Key
C49: library part CC0603JRNPO9BN330, "CAP CER 33PF 50V NPO 0603", Device Package="0603 (1608 Metric)", Manufacturer=Yageo, Supplier Part Number 1=311-1064-2-ND, TemperatureCoefficient="C0G, NP0", TemperatureRange="-55C ~ 125C", Tolerance=5%, Voltage=50V, ComponentLink1Description=Datasheet, ComponentLink1URL=http://www.yageo.com/documents/recent/UPY-GP_NP0_16V-to-50V_10.pdf, ComponentLink2Description="Digi-Key listing", ComponentLink2URL=http://digikey.com/product-detail/en/CC0603JRNPO9BN330/311-1064-2-ND/302798, PartId=5290, Part Number=CC0603JRNPO9BN330, Price=0,0075, Supplier 1=Digi-Key, Type=-
C50: library part 500R14N150JV4T, "CAP CER 15PF 50V C0G/NP0 0603", Device Package="0603 (1608 Metric)", Manufacturer="Johanson Dielectrics Inc.", Supplier Part Number 1=709-1142-2-ND, TemperatureCoefficient="C0G, NP0", TemperatureRange="-55C ~ 125C", Tolerance=5%, Voltage=50V, ComponentLink1Description=Datasheet, ComponentLink1URL=https://www.johansondielectrics.com/downloads/jdi-product-catalog.pdf, ComponentLink2Description="Digi-Key Listing", ComponentLink2URL=https://www.digikey.com/product-detail/en/johanson-dielectrics-inc/500R14N150JV4T/709-1142-2-ND/1859387, PartId=30768, Part Number=500R14N150JV4T, Price=0, Supplier 1=Digi-Key
C51: library part C1608X5R1C335K080AC, "CAP CER 3.3UF 16V X5R 0603", Device Package="0603 (1608 Metric)", Manufacturer="TDK Corporation", Supplier Part Number 1=445-7476-2-ND, TemperatureCoefficient=X5R, TemperatureRange="-55C ~ 85C", Tolerance=10%, Voltage=16V, ComponentLink1Description=Datasheet, ComponentLink1URL=https://product.tdk.com/info/en/catalog/datasheets/mlcc_commercial_general_en.pdf, ComponentLink2Description="Digi-Key Listing", ComponentLink2URL=https://www.digikey.com/product-detail/en/tdk-corporation/C1608X5R1C335K080AC/445-7476-2-ND/2732911, PartId=13059, Part Number=C1608X5R1C335K080AC, Price=0,0555, Supplier 1=Digi-Key
C52: library part CL10B182KB8NNNC, "CAP CER 1800PF 50V X7R 0603", Device Package="0603 (1608 Metric)", Manufacturer="Samsung Electro-Mechanics America, Inc.", Supplier Part Number 1=1276-1976-2-ND, TemperatureCoefficient=X7R, TemperatureRange="-55C ~ 125C", Tolerance=10%, Voltage=50V, ComponentLink1Description=Datasheet, ComponentLink1URL=http://www.samsungsem.com/kr/support/product-search/mlcc/CL10B182KB8NNNC.jsp, ComponentLink2Description="Digi-Key listing", ComponentLink2URL=http://digikey.com/product-detail/en/CL10B182KB8NNNC/1276-1976-2-ND/3887634, PartId=5348, Part Number=CL10B182KB8NNNC, Price=0,0097, Supplier 1=Digi-Key, Type=-
C53: library part CL10B681KB8NNNC, "CAP CER 680PF 50V X7R 0603", Device Package="0603 (1608 Metric)", Manufacturer="Samsung Electro-Mechanics America, Inc.", Supplier Part Number 1=1276-1080-2-ND, TemperatureCoefficient=X7R, TemperatureRange="-55C ~ 125C", Tolerance=10%, Voltage=50V, ComponentLink1Description=Datasheet, ComponentLink1URL=http://www.samsungsem.com/kr/support/product-search/mlcc/CL10B681KB8NNNC.jsp, ComponentLink2Description="Digi-Key listing", ComponentLink2URL=http://digikey.com/product-detail/en/CL10B681KB8NNNC/1276-1080-2-ND/3886738, PartId=5326, Part Number=CL10B681KB8NNNC, Price=0,0086, Supplier 1=Digi-Key, Type=-
C54 C55: library part CL10C101KB8NNNC, "CAP CER 100PF 50V NP0 0603", Device Package="0603 (1608 Metric)", Manufacturer="Samsung Electro-Mechanics America, Inc.", Supplier Part Number 1=1276-2167-2-ND, TemperatureCoefficient="C0G, NP0", TemperatureRange="-55C ~ 125C", Tolerance=10%, Voltage=50V, ComponentLink1Description=Datasheet, ComponentLink1URL=http://www.samsungsem.com/kr/support/product-search/mlcc/CL10C101KB8NNNC.jsp, ComponentLink2Description="Digi-Key listing", ComponentLink2URL=http://digikey.com/product-detail/en/CL10C101KB8NNNC/1276-2167-2-ND/3887825, PartId=5284, Part Number=CL10C101KB8NNNC, Price=0,0069, Supplier 1=Digi-Key, Type=-
D1: library part DIODE_SCHOTTKY, Manufacturer=MacroFab, Manufacturer Part Number 1=MF-DIO-SOD123-BAT42
D3: library part DIODE_SCHOTTKY, Manufacturer 1=MacroFab, Manufacturer Part Number 1=MF-DIO-SOD123-BAT42
D4 D5: library part LTST-C170KFKT, "LED ORANGE CLEAR 0805 SMD", Current (Test)=20mA, Device Package="0805 (2012 Metric)", Manufacturer="Lite-On Inc.", Supplier Part Number 1=160-1413-2-ND, Voltage Forward=2V, Colour=Orange, ComponentLink1Description=Datasheet, ComponentLink1URL=http://optoelectronics.liteon.com/upload/download/DS-22-99-0185/S_110_LTST-C170KFKT.pdf, ComponentLink2Description="Digi-Key Listing", ComponentLink2URL=http://www.digikey.ca/product-detail/en/LTST-C170KFKT/160-1413-2-ND/386775, Lens Transparency=Clear, Millicandela=90mcd, PartId=7079, Part Number=LTST-C170KFKT, Price=0,0638, Supplier 1=Digi-Key, Type="Surface Mount", Viewing Angle=130
D6: "LED RGB 622NM 530NM 470NM 6SMD", Colour="Red, Green, Blue (RGB)", Current (Test)="20mA Red, 20mA Green, 20mA Blue", Device Package="6-SMD, J-Lead", Manufacturer="Cree Inc.", Supplier Part Number 1=SLV6A-FKB-CK1P1G1BB7R3R3TR-ND, Voltage Forward="2V Red, 3.2V Green, 3.2V Blue", ComponentLink1Description=Datasheet, ComponentLink1URL=http://www.cree.com/led-components/media/documents/1320-SLV6A-FKB.pdf, ComponentLink2Description="Digi-Key Listing", ComponentLink2URL=https://www.digikey.com/product-detail/en/cree-inc/SLV6A-FKB-CK1P1G1BB7R3R3/SLV6A-FKB-CK1P1G1BB7R3R3TR-ND/5638271?, Lens Transparency=-, Millicandela="840mcd Red, 1680mcd Green, 420mcd Blue", PartId=29699, Part Number=SLV6A-FKB-CK1P1G1BB7R3R3, Price=0,323, Supplier 1=Digi-Key, Viewing Angle=-
DN OK RESET UP: "SWITCH TACTILE SPST-NO 0.05A 24V", Contact Rating @ Voltage="0.05A @ 24VDC", Illumination Type, Colour=-, Manufacturer="TE Connectivity Alcoswitch Switches", Operating Force=180gf, Operating Temperature="-35C ~ 85C", Supplier Part Number 1=450-1758-2-ND, Actuator Orientation="Top Actuated", Actuator Type=Standard, Circuit=SPST-NO, ComponentLink1Description=Datasheet, ComponentLink1URL=http://www.te.com/commerce/DocumentDelivery/DDEController?Action=srchrtrv&DocNm=1437566-3&DocType=Customer+Drawing&DocLang=English, ComponentLink2Description="Digi-Key Listing", ComponentLink2URL=http://www.digikey.com/product-detail/en/FSMSMTR/450-1758-2-ND/529671, Illumination=Non-Illuminated, Illumination Voltage=-, Mechanical Life="20,000 Cycles", PartId=8251, Part Number=FSMSMTR, Price=0,175, Supplier 1=Digi-Key, Switch Function=Off-Mom, Switch Travel=0.25mm
FB1 FB2: library part MPZ1608S300ATAH0, "FERRITE CHIP 30 OHM 5A 0603", Current Rating=5A, DC Resistance="10 mOhm Max", Device Package="0603 (1608 Metric)", Manufacturer="TDK Corporation", Supplier Part Number 1=445-1562-2-ND, ComponentLink1Description=Datasheet, ComponentLink1URL=https://product.tdk.com/info/en/catalog/datasheets/beads_commercial_power_mpz1608_en.pdf, ComponentLink2Description="Digi-Key listing", ComponentLink2URL=http://digikey.com/product-detail/en/MPZ1608S300ATAH0/445-1562-2-ND/571869, PartId=6638, Part Number=MPZ1608S300ATAH0, Price=0,0298, Supplier 1=Digi-Key, Type="Differential Mode - Single"
J1: library part USB-C_RECPT, Manufacturer=Molex, Manufacturer Part Number 1=1054500101
J2: library part CONN_HEADER_02x03_2mm54_Straight, Manufacturer 1=MacroFab, Manufacturer Part Number 1=MF-CON-2.54mm-2x3
L1: library part INDUCTOR, Current=540mA, Manufacturer 1=MacroFab, DCR=133mOhm, FootprintDisplay=L1210, Manufacturer Part Number 1=MF-IND-1210-10uH
L2: library part 744311220, "FIXED IND 2.2UH 9A 11.4 MOHM SMD", Current Rating=9A, DC Resistance (DCR)="11.4 mOhm", Device Package=Nonstandard, Frequency - Self Resonant=52MHz, Manufacturer="Wurth Electronics Inc", Operating Temperature="-40C ~ 150C", Q @ Freq=-, Supplier Part Number 1=732-1151-2-ND, Tolerance=20%, ComponentLink1Description=Datasheet, ComponentLink1URL=http://katalog.we-online.de/pbs/datasheet/744311220.pdf, ComponentLink2Description="Digi-Key Listing", ComponentLink2URL=https://www.digikey.com/product-detail/en/744311220/732-1151-2-ND/1638556, Inductance=2.2uH, PartId=9682, Part Number=744311220, Price=2,85, Series=WE-HCI, Shielding=Shielded, Supplier 1=Digi-Key, Type=Wirewound
Q1 Q2 Q3 Q4: "Trans MOSFET N-CH 30V 48A 8-Pin VSONP EP T/R", Package="SON-8 Texas Instruments", Availability=Unavailable, MF="Texas Instruments", MP=CSD17551Q3A, Price=None, SnapEDA_Link=https://www.snapeda.com/parts/CSD17551Q3A/Texas%20Instruments/view-part/?ref=snap
Q5: "Trans MOSFET P-CH –20 V -15A NexFET™ Power MOSFET", Package="SON-8 Texas Instruments", Availability=Unavailable, MF="Texas Instruments", MP=CSD17551Q3A, Price=None, SnapEDA_Link=https://www.snapeda.com/parts/CSD17551Q3A/Texas%20Instruments/view-part/?ref=snap
R1: library part ERJ-2GEJ684X, "RES SMD 680K OHM 5% 1/10W 0402", Device Package="0402 (1005 Metric)", Manufacturer="Panasonic Electronic Components", PowerRating="0.1W, 1/10W", Supplier Part Number 1=P680KJTR-ND, TemperatureCoefficient=200ppm/C, TemperatureRange="-55C ~ 155C", Tolerance=5%, ComponentLink1Description=Datasheet, ComponentLink1URL=http://industrial.panasonic.com/www-cgi/jvcr13pz.cgi?E+PZ+3+AOA0001+ERJ2GEJ684X+7+WW, ComponentLink2Description="Digi-Key Listing", ComponentLink2URL=https://www.digikey.com/product-detail/en/panasonic-electronic-components/ERJ-2GEJ684X/P680KJTR-ND/147058, PartId=11069, Part Number=ERJ-2GEJ684X, Price=0,0019, Supplier 1=Digi-Key
R2: library part ERJ-2GEJ224X, "RES SMD 220K OHM 5% 1/10W 0402", Device Package="0402 (1005 Metric)", Manufacturer="Panasonic Electronic Components", PowerRating="0.1W, 1/10W", Supplier Part Number 1=P220KJTR-ND, TemperatureCoefficient=200ppm/C, TemperatureRange="-55C ~ 155C", Tolerance=5%, ComponentLink1Description=Datasheet, ComponentLink1URL=http://industrial.panasonic.com/www-cgi/jvcr13pz.cgi?E+PZ+3+AOA0001+ERJ2GEJ224X+7+WW, ComponentLink2Description="Digi-Key Listing", ComponentLink2URL=https://www.digikey.com/product-detail/en/panasonic-electronic-components/ERJ-2GEJ224X/P220KJTR-ND/146936, PartId=11020, Part Number=ERJ-2GEJ224X, Price=0,0019, Supplier 1=Digi-Key
R3: library part ERJ-2GEJ331X, "RES SMD 330 OHM 5% 1/10W 0402", Device Package="0402 (1005 Metric)", Manufacturer="Panasonic Electronic Components", PowerRating="0.1W, 1/10W", Supplier Part Number 1=P330JTR-ND, TemperatureCoefficient=200ppm/C, TemperatureRange="-55C ~ 155C", Tolerance=5%, ComponentLink1Description=Datasheet, ComponentLink1URL=http://industrial.panasonic.com/www-cgi/jvcr13pz.cgi?E+PZ+3+AOA0001+ERJ2GEJ331X+7+WW, ComponentLink2Description="Digi-Key Listing", ComponentLink2URL=https://www.digikey.com/product-detail/en/panasonic-electronic-components/ERJ-2GEJ331X/P330JTR-ND/146976, PartId=11000, Part Number=ERJ-2GEJ331X, Price=0,0019, Supplier 1=Digi-Key
R4 R7 R13 R14 R15 R30: library part ERJ-2GEJ103X, "RES SMD 10K OHM 5% 1/10W 0402", Device Package="0402 (1005 Metric)", Manufacturer="Panasonic Electronic Components", PowerRating="0.1W, 1/10W", Supplier Part Number 1=P10KJTR-ND, TemperatureCoefficient=200ppm/C, TemperatureRange="-55C ~ 155C", Tolerance=5%, ComponentLink1Description=Datasheet, ComponentLink1URL=http://industrial.panasonic.com/www-cgi/jvcr13pz.cgi?E+PZ+3+AOA0001+ERJ2GEJ103X+7+WW, ComponentLink2Description="Digi-Key Listing", ComponentLink2URL=https://www.digikey.com/product-detail/en/panasonic-electronic-components/ERJ-2GEJ103X/P10KJTR-ND/146735, PartId=10981, Part Number=ERJ-2GEJ103X, Price=0,0019, Supplier 1=Digi-Key
R5 R6 R8 R9 R10: library part ERJ-3GEYJ471V, "RES SMD 470 OHM 5% 1/10W 0603", Device Package="0603 (1608 Metric)", Manufacturer="Panasonic Electronic Components", PowerRating="0.1W, 1/10W", Supplier Part Number 1=P470GTR-ND, TemperatureCoefficient=200ppm/C, TemperatureRange="-55C ~ 155C", Tolerance=5%, ComponentLink1Description=Datasheet, ComponentLink1URL=http://industrial.panasonic.com/www-cgi/jvcr13pz.cgi?E+PZ+3+AOA0001+ERJ3GEYJ471V+7+WW, ComponentLink2Description="Digi-Key Listing", ComponentLink2URL=https://www.digikey.com/product-detail/en/panasonic-electronic-components/ERJ-3GEYJ471V/P470GTR-ND/135784, PartId=11180, Part Number=ERJ-3GEYJ471V, Price=0,002, Supplier 1=Digi-Key
R11 R12: library part ERJ-3GEYJ152V, "RES SMD 1.5K OHM 5% 1/10W 0603", Device Package="0603 (1608 Metric)", Manufacturer="Panasonic Electronic Components", PowerRating="0.1W, 1/10W", Supplier Part Number 1=P1.5KGTR-ND, TemperatureCoefficient=200ppm/C, TemperatureRange="-55C ~ 155C", Tolerance=5%, ComponentLink1Description=Datasheet, ComponentLink1URL=http://industrial.panasonic.com/www-cgi/jvcr13pz.cgi?E+PZ+3+AOA0001+ERJ3GEYJ152V+7+WW, ComponentLink2Description="Digi-Key Listing", ComponentLink2URL=https://www.digikey.com/product-detail/en/panasonic-electronic-components/ERJ-3GEYJ152V/P1.5KGTR-ND/104381, PartId=11208, Part Number=ERJ-3GEYJ152V, Price=0,002, Supplier 1=Digi-Key
R16 R21: "RES SMD 0.01 OHM 1% 1W 2512", Device Package="2512 (6432 Metric)", Manufacturer=Riedon, PowerRating=1W, Supplier Part Number 1=696-1655-2-ND, TemperatureCoefficient=75ppm/C, TemperatureRange="-55C ~ 170C", Tolerance=1%, ComponentLink1Description=Datasheet, ComponentLink1URL=http://riedon.com/media/pdf/CSR.pdf, ComponentLink2Description="Digi-Key Listing", ComponentLink2URL=https://www.digikey.com/product-detail/en/riedon/CSR25120R01F/696-1655-2-ND/5723617, PartId=21369, Part Number=CSR25120R01F, Price=0,1729, Supplier 1=Digi-Key
R17 R18: library part RC0603FR-074R99L, "RES SMD 4.99 OHM 1% 1/10W 0603", Device Package="0603 (1608 Metric)", Manufacturer=Yageo, PowerRating="0.1W, 1/10W", Supplier Part Number 1=311-4.99HRCT-ND, TemperatureCoefficient=200ppm/C, TemperatureRange="-55C ~ 155C", Tolerance=1%, ComponentLink1Description=Datasheet, ComponentLink1URL=http://www.yageo.com/NewPortal/yageodocoutput?fileName=/pdf/R-Chip/PYu-RC_Group_51_RoHS_L_4.pdf, ComponentLink2Description="Digi-Key Listing", ComponentLink2URL=https://www.digikey.com/product-detail/en/yageo/RC0603FR-074R99L/311-4.99HRCT-ND/730165, PartId=27963, Part Number=RC0603FR-074R99L, Price=0,1, Supplier 1=Digi-Key
R19: library part RCS06031R00JNEA, "RES SMD 1 OHM 5% 1/4W 0603", Device Package="0603 (1608 Metric)", Manufacturer="Vishay Dale", PowerRating="0.25W, 1/4W", Supplier Part Number 1=541-2805-1-ND, TemperatureCoefficient=200ppm/C, TemperatureRange="-55C ~ 155C", Tolerance=5%, ComponentLink1Description=Datasheet, ComponentLink1URL=http://www.vishay.com/docs/20065/rcse3.pdf, ComponentLink2Description="Digi-Key Listing", ComponentLink2URL=https://www.digikey.com/product-detail/en/vishay-dale/RCS06031R00JNEA/541-2805-1-ND/5867098, PartId=28337, Part Number=RCS06031R00JNEA, Price=0,14, Supplier 1=Digi-Key
R20 R22: library part ERJ-2RKF10R0X, "RES SMD 10 OHM 1% 1/10W 0402", Device Package="0402 (1005 Metric)", Manufacturer="Panasonic Electronic Components", PowerRating="0.1W, 1/10W", Supplier Part Number 1=P10.0LTR-ND, TemperatureCoefficient=100ppm/C, TemperatureRange="-55C ~ 155C", Tolerance=1%, ComponentLink1Description=Datasheet, ComponentLink1URL=http://industrial.panasonic.com/www-cgi/jvcr13pz.cgi?E+PZ+3+AOA0002+ERJ2RKF10R0X+7+WW, ComponentLink2Description="Digikey listing", ComponentLink2URL=http://digikey.com/product-detail/en/ERJ-2RKF10R0X/P10.0LTR-ND/192072, PartId=14, Part Number=ERJ-2RKF10R0X, Price=0,0043, Supplier 1=Digi-Key, Type="Thick Film"
R23: library part ERJ-3EKF1203V, "RES SMD 120K OHM 1% 1/10W 0603", Device Package="0603 (1608 Metric)", Manufacturer="Panasonic Electronic Components", PowerRating="0.1W, 1/10W", Supplier Part Number 1=P120KHTR-ND, TemperatureCoefficient=100ppm/C, TemperatureRange="-55C ~ 155C", Tolerance=1%, ComponentLink1Description=Datasheet, ComponentLink1URL=http://industrial.panasonic.com/www-cgi/jvcr13pz.cgi?E+PZ+3+AOA0002+ERJ3EKF1203V+7+WW, ComponentLink2Description="Digi-Key listing", ComponentLink2URL=http://digikey.com/product-detail/en/ERJ-3EKF1203V/P120KHTR-ND/1746307, PartId=962, Part Number=ERJ-3EKF1203V, Price=0,0038, Supplier 1=Digi-Key, Type="Thick Film"
R24: library part RMCF0603FT10R0, "RES SMD 10 OHM 1% 1/10W 0603", Device Package="0603 (1608 Metric)", Manufacturer="Stackpole Electronics Inc.", PowerRating="0.1W, 1/10W", Supplier Part Number 1=RMCF0603FT10R0CT-ND, TemperatureCoefficient=100ppm/C, TemperatureRange="-55C ~ 155C", Tolerance=1%, ComponentLink1Description=Datasheet, ComponentLink1URL=https://www.seielect.com/Catalog/SEI-RMCF_RMCP.pdf, ComponentLink2Description="Digi-Key Listing", ComponentLink2URL=https://www.digikey.com/product-detail/en/stackpole-electronics-inc/RMCF0603FT10R0/RMCF0603FT10R0CT-ND/1942943, PartId=27980, Part Number=RMCF0603FT10R0, Price=0,1, Supplier 1=Digi-Key
R25: library part ERJ-3EKF4022V, "RES SMD 40.2K OHM 1% 1/10W 0603", Device Package="0603 (1608 Metric)", Manufacturer="Panasonic Electronic Components", PowerRating="0.1W, 1/10W", Supplier Part Number 1=P40.2KHTR-ND, TemperatureCoefficient=100ppm/C, TemperatureRange="-55C ~ 155C", Tolerance=1%, ComponentLink1Description=Datasheet, ComponentLink1URL=http://industrial.panasonic.com/www-cgi/jvcr13pz.cgi?E+PZ+3+AOA0002+ERJ3EKF4022V+7+WW, ComponentLink2Description="Digi-Key listing", ComponentLink2URL=http://digikey.com/product-detail/en/ERJ-3EKF4022V/P40.2KHTR-ND/196343, PartId=1077, Part Number=ERJ-3EKF4022V, Price=0,0038, Supplier 1=Digi-Key, Type="Thick Film"
R26: library part ERJ-3EKF1002V, "RES SMD 10K OHM 1% 1/10W 0603", Device Package="0603 (1608 Metric)", Manufacturer="Panasonic Electronic Components", PowerRating="0.1W, 1/10W", Supplier Part Number 1=P10.0KHTR-ND, TemperatureCoefficient=100ppm/C, TemperatureRange="-55C ~ 155C", Tolerance=1%, ComponentLink1Description=Datasheet, ComponentLink1URL=http://industrial.panasonic.com/www-cgi/jvcr13pz.cgi?E+PZ+3+AOA0002+ERJ3EKF1002V+7+WW, ComponentLink2Description="Digi-Key listing", ComponentLink2URL=http://digikey.com/product-detail/en/ERJ-3EKF1002V/P10.0KHTR-ND/196066, PartId=886, Part Number=ERJ-3EKF1002V, Price=0,0038, Supplier 1=Digi-Key, Type="Thick Film"
R27: library part ERJ-3EKF1003V, "RES SMD 100K OHM 1% 1/10W 0603", Device Package="0603 (1608 Metric)", Manufacturer="Panasonic Electronic Components", PowerRating="0.1W, 1/10W", Supplier Part Number 1=P100KHTR-ND, TemperatureCoefficient=100ppm/C, TemperatureRange="-55C ~ 155C", Tolerance=1%, ComponentLink1Description=Datasheet, ComponentLink1URL=http://industrial.panasonic.com/www-cgi/jvcr13pz.cgi?E+PZ+3+AOA0002+ERJ3EKF1003V+7+WW, ComponentLink2Description="Digi-Key listing", ComponentLink2URL=http://digikey.com/product-detail/en/ERJ-3EKF1003V/P100KHTR-ND/196075, PartId=887, Part Number=ERJ-3EKF1003V, Price=0,0038, Supplier 1=Digi-Key, Type="Thick Film"
R28: library part ERJ-3EKF1373V, "RES SMD 137K OHM 1% 1/10W 0603", Device Package="0603 (1608 Metric)", Manufacturer="Panasonic Electronic Components", PowerRating="0.1W, 1/10W", Supplier Part Number 1=P137KHTR-ND, TemperatureCoefficient=100ppm/C, TemperatureRange="-55C ~ 155C", Tolerance=1%, ComponentLink1Description=Datasheet, ComponentLink1URL=http://industrial.panasonic.com/www-cgi/jvcr13pz.cgi?E+PZ+3+AOA0002+ERJ3EKF1373V+7+WW, ComponentLink2Description="Digi-Key listing", ComponentLink2URL=http://digikey.com/product-detail/en/ERJ-3EKF1373V/P137KHTR-ND/196120, PartId=1208, Part Number=ERJ-3EKF1373V, Price=0,0038, Supplier 1=Digi-Key, Type="Thick Film"
R29: library part ERJ-2RKF3012X, "RES SMD 30.1K OHM 1% 1/10W 0402", Device Package="0402 (1005 Metric)", Manufacturer="Panasonic Electronic Components", PowerRating="0.1W, 1/10W", Supplier Part Number 1=P30.1KLTR-ND, TemperatureCoefficient=100ppm/C, TemperatureRange="-55C ~ 155C", Tolerance=1%, ComponentLink1Description=Datasheet, ComponentLink1URL=http://industrial.panasonic.com/www-cgi/jvcr13pz.cgi?E+PZ+3+AOA0002+ERJ2RKF3012X+7+WW, ComponentLink2Description="Digikey listing", ComponentLink2URL=http://digikey.com/product-detail/en/ERJ-2RKF3012X/P30.1KLTR-ND/192290, PartId=178, Part Number=ERJ-2RKF3012X, Price=0,0043, Supplier 1=Digi-Key, Type="Thick Film"
U1: library part BUCK_RT8258GJ6, Manufacturer 1=Richtek, Supplier Part Number 1=1028-1044-1-ND, Manufacturer Part Number 1=RT8258GJ6, Supplier 1=Digi-Key
U2: "MCU 32-bit SAM D21 ARM Cortex M0+ RISC 256KB Flash 3.3V 48-Pin TQFP T/R", Package="TQFP-48 Microchip", Digi-Key_Part_Number=ATSAMD21G18A-AUTCT-ND, Digi-Key_Purchase_URL=https://www.digikey.co.uk/product-detail/en/microchip-technology/ATSAMD21G18A-AUT/ATSAMD21G18A-AUTCT-ND/4878879?utm_source=snapeda&utm_medium=aggregator&utm_campaign=symbol, MF=Microchip, MP=ATSAMD21G18A-AUT, SnapEDA_Link=https://www.snapeda.com/parts/ATSAMD21G18A-AUT/Microchip/view-part/?ref=snap
U3: library part FUSB302B, Manufacturer 1=Fairchild/ON, Supplier Part Number 1=FUSB302BMPXCT-ND, Manufacturer Part Number 1=FUSB302BMPX, Supplier 1=Digi-Key
U4: "NVDC I2C Battery Buck-Boost Charge Controller with System Power Monitor & Processor 32-QFN -40 to 85", Package="QFN-32 Texas Instruments", Availability=Unavailable, MF="Texas Instruments", MP=BQ25703ARSNT, Price=None, SnapEDA_Link=https://www.snapeda.com/parts/BQ25703ARSNT/Texas%20Instruments/view-part/?ref=snap
Y1: library part RESONATOR_EPSON_FC_145

## Free pads (board coordinates)
  round 3 hole 2.5: ""(2.5,2.5) ""(2.5,30) ""(2.5,37.5) ""(2.5,65) ""(75,2.5) ""(75,30) ""(75,37.5) ""(75,65)
  round 1 smd: ""(5.4,24.8) ""(5.4,26.2)
  round 3 smd far side: ""(33.7,26.6) ""(56.9,26.7)
  round 1 smd far side: ""(56.9,4.4) ""(58.2,4.4) ""(59.5,4.4) ""(60.8,4.4)
  oct 3.5x3.5 smd: ""(73.5,7.9) ""(73.5,24.7)
  oct 5x5 smd: ""(73.5,16.3)

## Via types
v1: diameter 0.45, hole 0.2, Top Layer to Bottom Layer, 138 vias
v2: diameter 0.7, hole 0.3, Top Layer to Bottom Layer, tented both sides, 123 vias
v3: diameter 0.7, hole 0.3, Top Layer to Bottom Layer, 19 vias
v4: diameter 0.45, hole 0.2, Top Layer to Bottom Layer, tented both sides, 5 vias
v5: diameter 0.8, hole 0.4, Top Layer to Bottom Layer, 2 vias
v6: diameter 0.7, hole 0.4, Top Layer to Bottom Layer, 1 vias